# EAGLE board simduino (EAGLE 6.4)
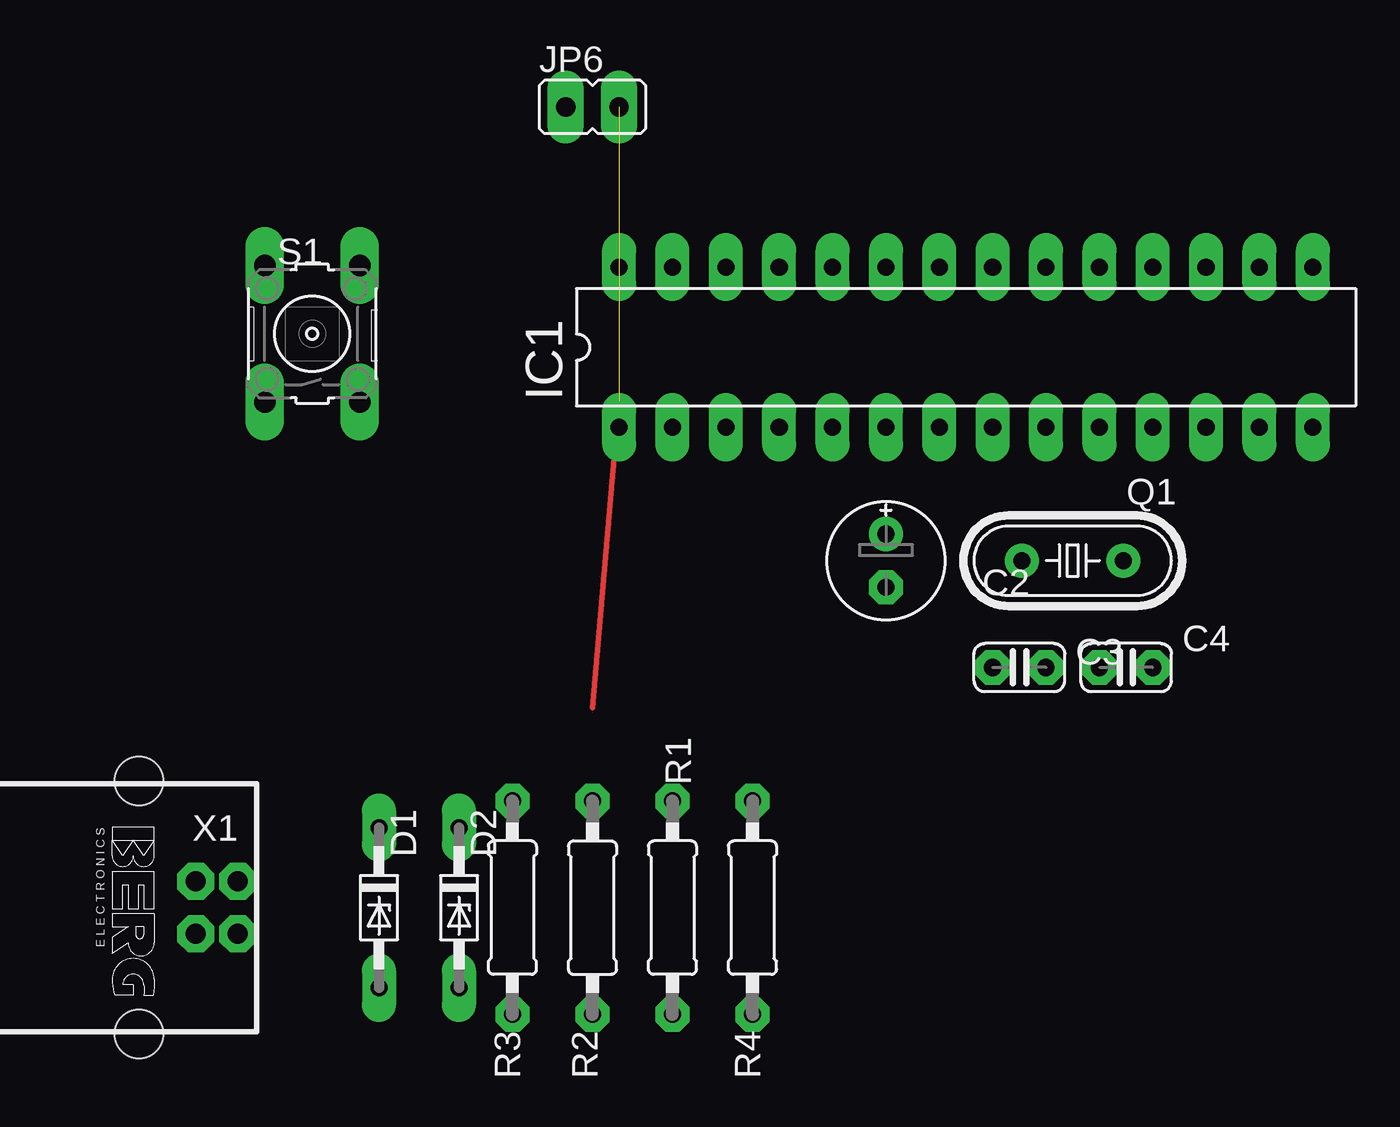
[diagram p0: board, top side]
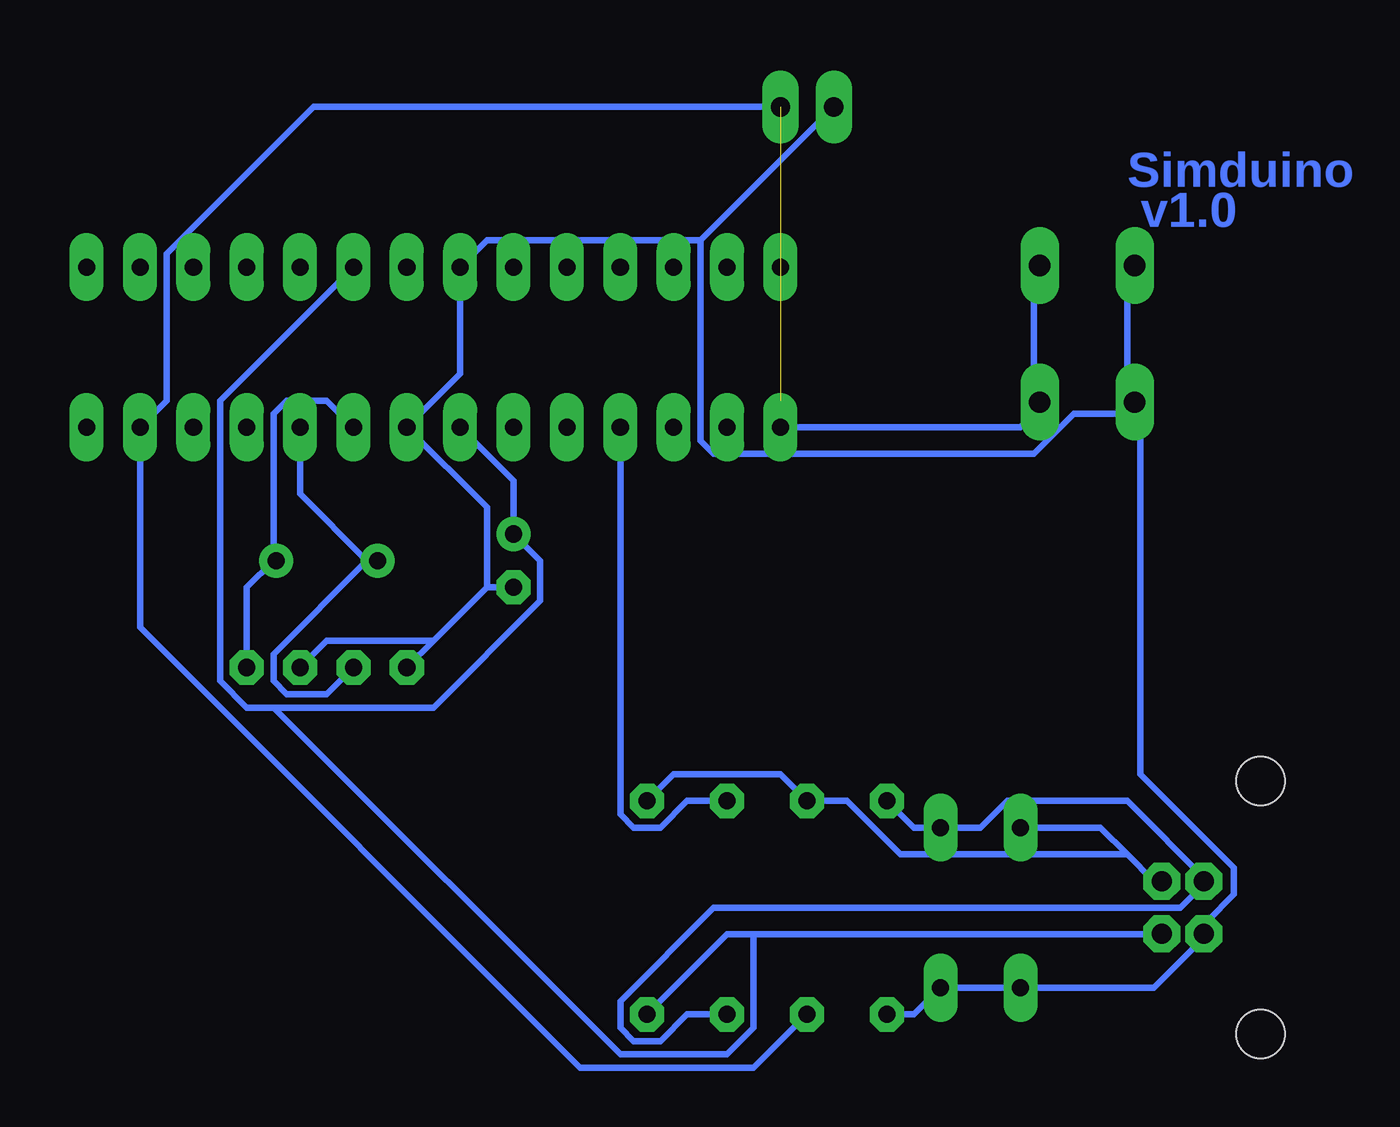
[diagram p1: board, bottom side, seen from below]

No outline drawn. Coordinates in mm, seen from the top.
Copper layers (1*16): Top 0.035mm / dielectric 1.5mm / Bottom 0.035mm
Design rules "mine": minimum track width 12mil, minimum drill 31mil, track to track 8mil, track to pad 8mil, pad to pad 8mil, via to via 8mil, smd to smd 8mil, copper to edge 10mil, drill to drill 20mil, minimum pad ring 16mil, minimum via ring 15mil, stop-mask expansion 4mil, vias tented up to drill 0mil, thermal gap 10mil
bRestrict: area 12.5,48.1 to 17.9,53.5

## Footprints (pad centres in the part's own frame; a part is rotated, then mirrored left to right if it is on the bottom)
E2,5-6E = drill 0.813 pad 1.575: + -1.27,0 | drill 0.813 pad 1.575 octagon: - 1.27,0
C025-024X044 = drill 0.813 octagon: 1 -1.27,0; 2 1.27,0
DO34Z7 = drill 0.813 long: A 3.81,0; C -3.81,0
DIL28-3 = drill 0.813 long: 1 -16.51,-3.81; 2 -13.97,-3.81; 3 -11.43,-3.81; 4 -8.89,-3.81; 5 -6.35,-3.81; 6 -3.81,-3.81; 7 -1.27,-3.81; 8 1.27,-3.81; 9 3.81,-3.81; 10 6.35,-3.81; 11 8.89,-3.81; 12 11.43,-3.81; 13 13.97,-3.81; 14 16.51,-3.81; 15 16.51,3.81; 16 13.97,3.81; 17 11.43,3.81; 18 8.89,3.81; 19 6.35,3.81; 20 3.81,3.81; 21 1.27,3.81; 22 -1.27,3.81; 23 -3.81,3.81; 24 -6.35,3.81; 25 -8.89,3.81; 26 -11.43,3.81; 27 -13.97,3.81; 28 -16.51,3.81
JP1 = drill 0.914 long: 1 0,-1.27; 2 0,1.27
HC49/S = drill 0.813: 1 -2.413,0; 2 2.413,0
0207/10 = drill 0.813 octagon: 1 -5.08,0; 2 5.08,0
B3F-10XX = drill 1.016 long: 1 -3.251,2.261; 2 3.251,2.261; 3 -3.251,-2.261; 4 3.251,-2.261
PN61729 = drill 0.95 octagon: 1 1.25,4.71; 2 -1.25,4.71; 3 -1.25,2.71; 4 1.25,2.71 | hole 2.3: -6.02,0; 6.02,0

## Placement (x,y rotation side)
C2  10uF  [E2,5-6E]  41.91,34.29 270 top
C3  22p  [C025-024X044]  48.26,29.21 0 top
C4  22p  [C025-024X044]  53.34,29.21 0 top
D1  3V6  [DO34Z7]  17.78,17.78 270 top
D2  3V6  [DO34Z7]  21.59,17.78 270 top
IC1  ATMEGA168-20P  [DIL28-3]  45.72,44.45 0 top
JP6  [JP1]  27.94,55.88 270 top
Q1  16MHz  [HC49/S]  50.8,34.29 0 top
R1  68  [0207/10]  31.75,17.78 90 top
R2  68  [0207/10]  27.94,17.78 270 top
R3  1M  [0207/10]  24.13,17.78 90 top
R4  1k5  [0207/10]  35.56,17.78 90 top
S1  [B3F-10XX]  14.61,45.09 90 top
X1  [PN61729]  6.35,17.78 270 top

## Library data of the parts
C2-C4 R1-R4 = rcl
D1 D2 = diode
IC1 = avr
JP6 = jumper
Q1 = crystal
S1 = switch-omron
X1 = con-berg

## Nets
+5USB: C2.+ IC1.7 IC1.20 R4.1 X1.1
D+: D2.C R1.1 R3.2 X1.3
D-: D1.C R2.1 R4.2 X1.2
GND: C2.- C3.1 C4.1 D1.A D2.A IC1.8 IC1.22 JP6.1 R3.1 S1.1 S1.2 X1.4
N$1: IC1.13 JP6.2 R2.2
N$2: IC1.1 S1.3 S1.4
N$3: IC1.4 R1.2
N$9: C3.2 IC1.10 Q1.1
N$10: C4.2 IC1.9 Q1.2

## Tracks (layer width: path | path; a pad name or v marks a point on that pad's centre or on a via)
+5USB
  Bottom 0.305: R4.1 31.75,16.51 30.48,16.51 | 30.48,16.51 11.43,16.51 X1.1 | IC1.7 41.91,38.1 C2.+ 40.64,34.29 40.64,32.38 45.72,27.3 53.34,27.3 | IC1.20 55.88,41.91 55.88,28.57 54.61,27.3 53.34,27.3 | 30.48,16.51 30.48,12.06 31.75,10.79 36.83,10.79 53.34,27.3
D+
  Bottom 0.305: R3.2 22.86,21.59 D2.C 19.68,21.59 18.41,22.86 12.7,22.86 8.89,19.05 X1.3 9.53,18.41 10.16,17.78 32.38,17.78 36.83,13.34 36.83,12.06 36.2,11.43 34.92,11.43 33.66,12.7 R1.1
D-
  Bottom 0.305: D1.C 13.97,21.59 12.7,20.32 | 12.7,20.32 11.43,19.05 X1.2 | 12.7,20.32 23.5,20.32 26.04,22.86 R2.1 29.21,24.13 34.29,24.13 R4.2
GND
  Bottom 0.305: S1.1 12.7,41.91 12.7,48.26 S1.2 | R3.1 22.86,12.7 D2.A D1.A 11.43,13.97 9.53,15.88 9.53,16.51 X1.4 8.89,17.14 7.62,18.41 7.62,19.68 12.06,24.13 12.06,41.27 S1.1 | 43.18,33.02 C2.- | C3.1 45.72,30.48 | 45.72,30.48 43.18,33.02 | C4.1 50.8,30.48 45.72,30.48 | 33.02,49.53 JP6.1 | 33.02,49.53 43.18,49.53 IC1.22 44.45,43.18 IC1.8 43.18,36.83 43.18,33.02 | 33.02,49.53 33.02,40.01 32.38,39.37 17.14,39.37 15.24,41.27 12.7,41.27 S1.1
N$1  (1 unrouted)
  Top 0.254: 27.94,27.3 29.21,41.91
  Bottom 0.305: R2.2 30.48,10.16 38.73,10.16 59.69,31.11 IC1.13 58.42,41.91 58.42,48.9 51.44,55.88 JP6.2
N$2
  Bottom 0.305: IC1.1 17.78,40.64 17.14,41.27 S1.3 17.14,41.91 17.14,48.26 S1.4
N$3
  Bottom 0.305: R1.2 33.66,22.86 34.92,21.59 36.2,21.59 36.83,22.23 IC1.4
N$9
  Bottom 0.305: C3.2 50.8,27.94 52.7,27.94 53.34,28.57 53.34,29.84 48.9,34.29 | IC1.10 52.07,37.47 48.9,34.29 | 48.9,34.29 Q1.1
N$10
  Bottom 0.305: C4.2 54.61,33.02 53.34,34.29 | IC1.9 50.8,41.91 52.7,41.91 53.34,41.27 53.34,34.29 | 53.34,34.29 Q1.2

## Text on the board
Bottom: Simduino | v1.0